# Altium PCB EB2018-LW27U19-P-MB03A(KL18).PcbDoc (part 2 of 2)
Units mm, origin at the board's own origin, x right, y up, seen from the top; angles counter-clockwise.
Board outline 338.42 x 232.18 mm, 2 copper layers (Top Layer, Bottom Layer); 163 components, 101 nets, 459 pads, 120 vias.
Unrouted connection lines stored in the file: 2.
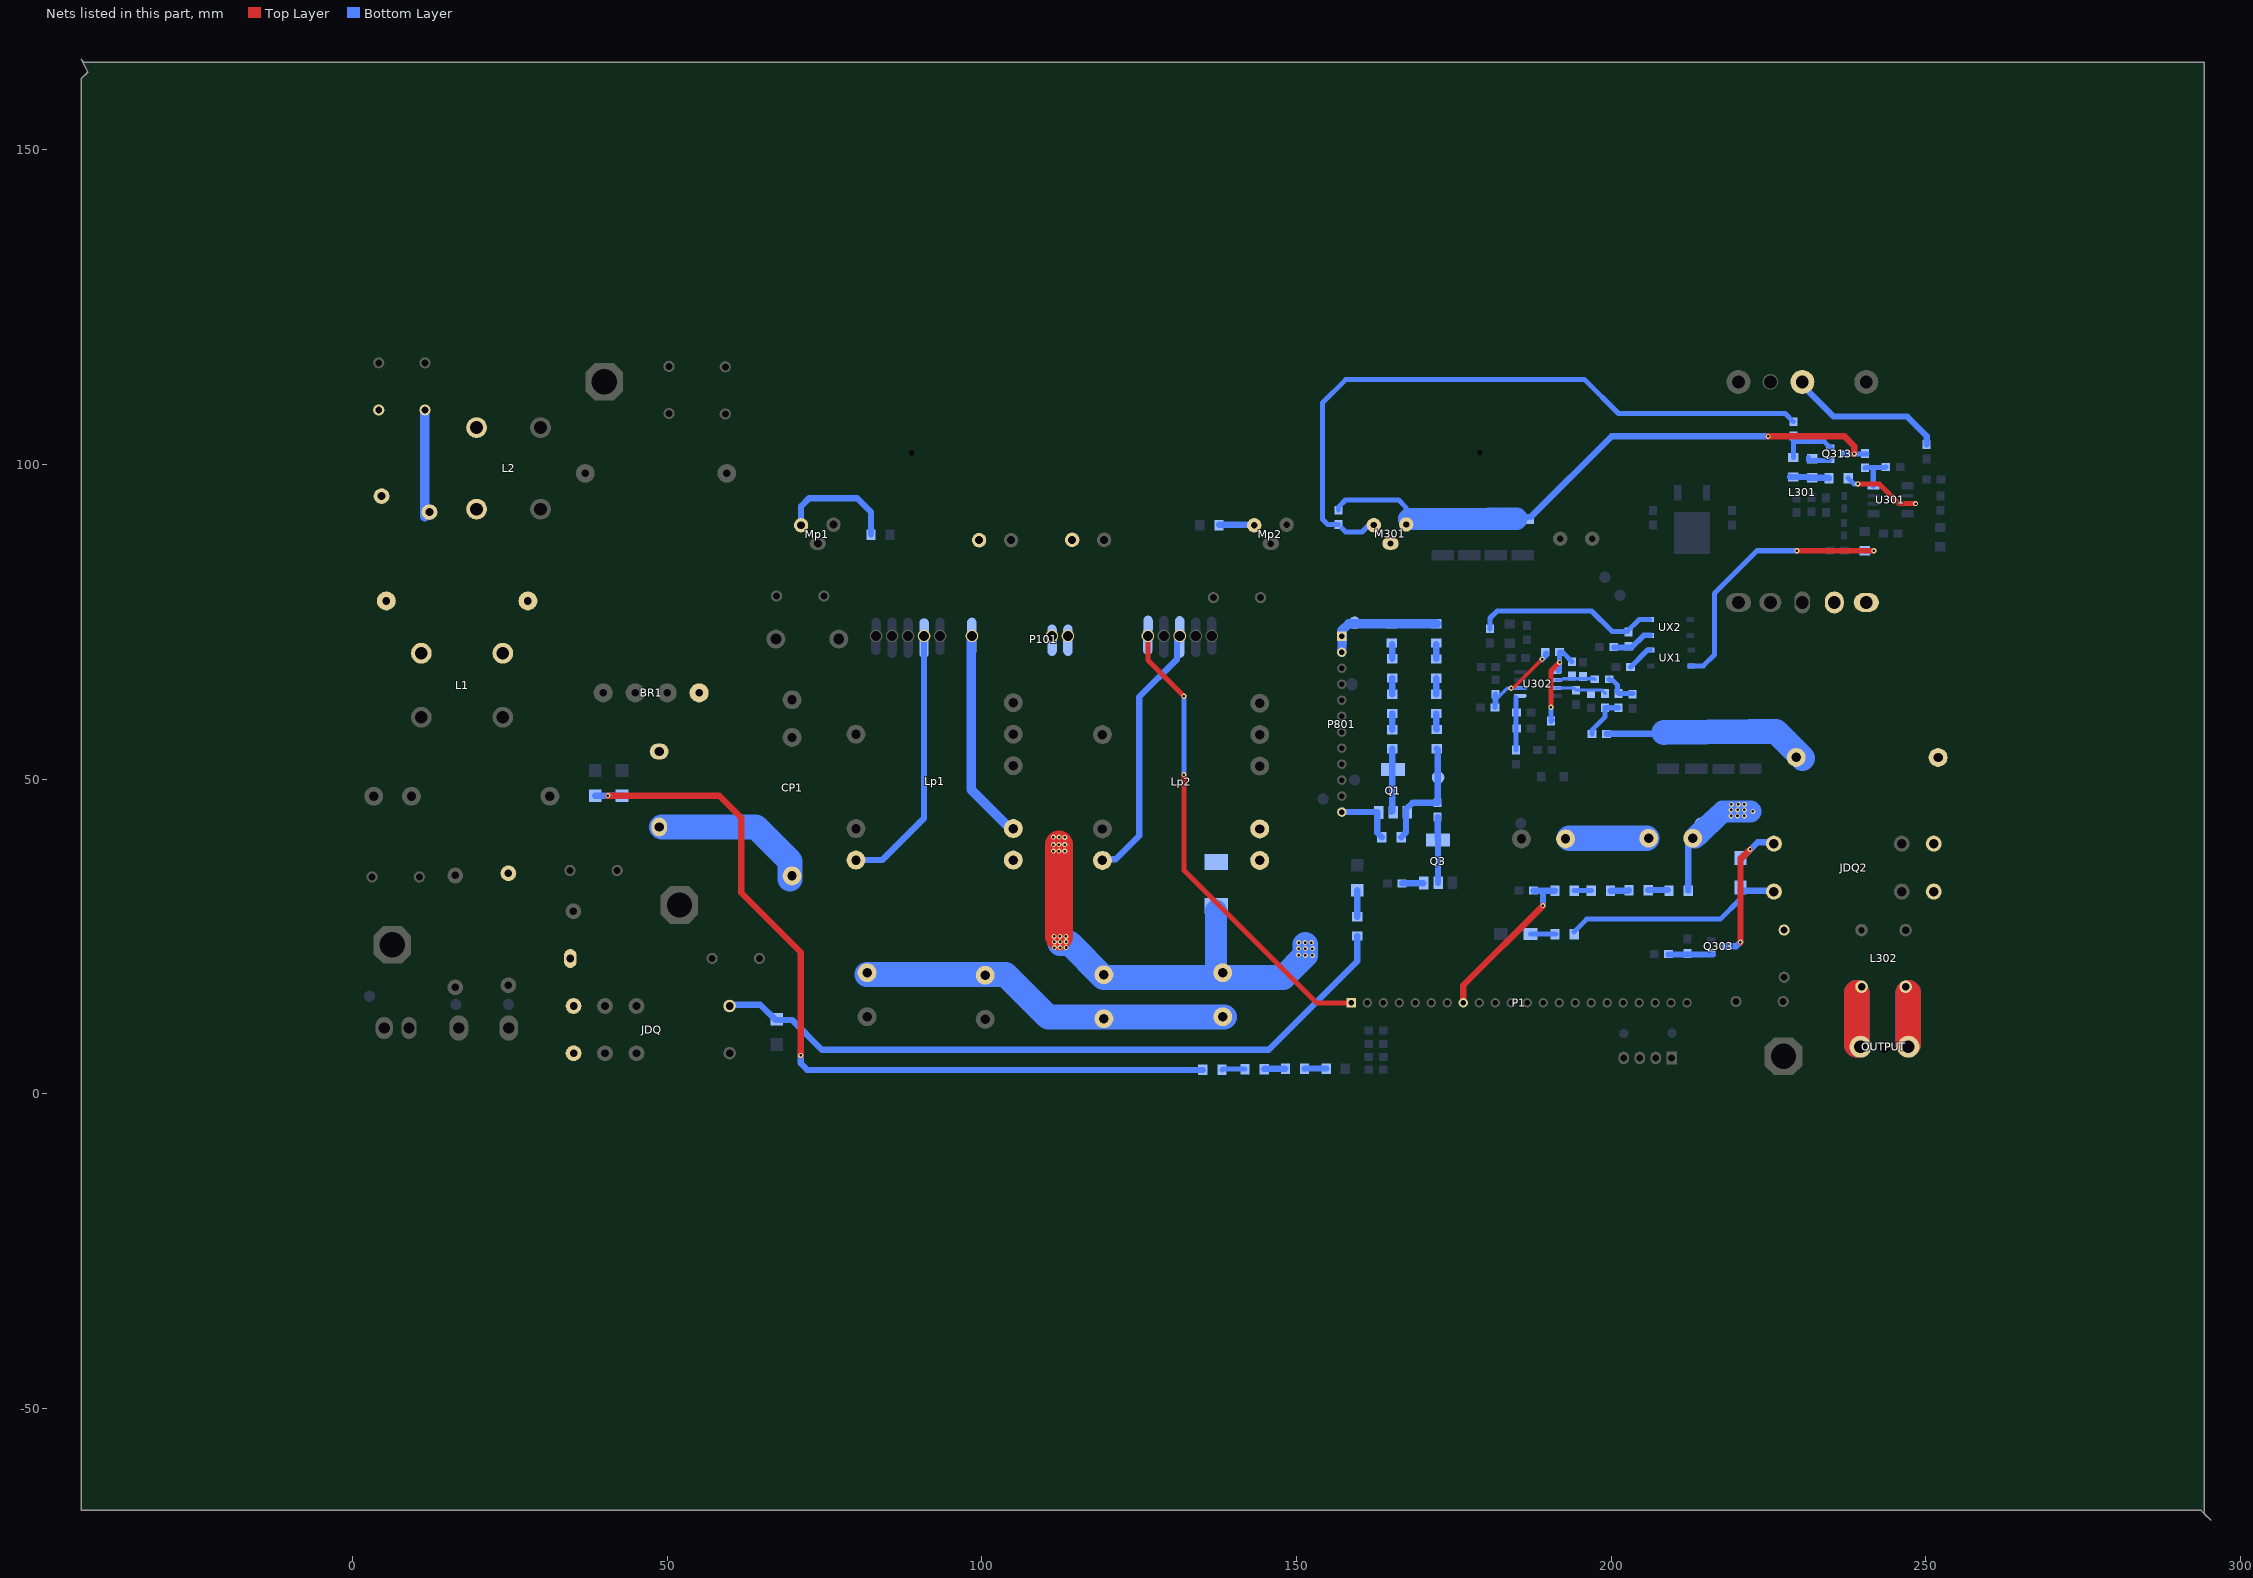
[diagram p2: the nets of this part, all layers, seen from the top]

## Via types
v1: diameter 0.8, hole 0.4, Top Layer to Bottom Layer, 120 vias

## Nets (pads, with @x,y where several pads share a name; then routed paths per layer and width w, separated by ;. In a path a pad name is that pad's centre, name@x,y a point inside that pad or via, vN(x,y) a via of type N, cw(c..) or ccw(c..) an arc to the next point about the centre after c; other vN are vias at no path point) (continued)
NetC315_1: C315.1 R314.1 U301.4 | length 6.3
  Bottom Layer w0.8: R314.1@240.351,99.472 240.41,99.531 241.776,99.531 ; U301.4@241.671,96.59 241.671,99.426 241.776,99.531 ; C315.1@243.658,99.59 243.599,99.531 241.776,99.531
NetC316_1: C316.1 R306.2 R307.1 U302.5 | length 8.4
  Bottom Layer w0.8: R307.1@184.881,54.644 184.881,60.576 U302.5@184.881,62.997
NetC317_1: C317.1 R305.1 R308.2 U302.6 | length 16.7
  Top Layer w0.6: v1(184.119,64.438) 184.418,64.438 v1(189.04,69.061)
  Bottom Layer w0.6: 181.842,62.133 181.842,62.762 183.519,64.438 v1(184.119,64.438) U302.6@186.405,64.438
  Bottom Layer w0.8: R308.2@181.558,61.39 181.558,63.416 C317.1@181.643,63.5 ; v1@188.994,68.939 R305.1@189.731,69.676 ; R305.1@189.712,70.057 R305.1@189.606,69.95 ; R305.1@189.606,69.95 189.606,69.857 R305.1@189.731,69.676 ; R305.1@189.606,69.95 R305.1@189.731,69.676
NetC318_1: C318.1 R331.2 R332.1 | length 7.1
  Bottom Layer w0.8: R331.2@196.994,57.187 196.994,57.822 199.078,59.905 R332.1@199.078,61.341 C318.1@201.2,61.341
NetC318_2: C318.2 R333.2 R334.1 | length 5.3
  Bottom Layer w0.8: R333.2@199.713,65.869 199.948,65.634 200.338,65.634 201.057,64.915 201.057,63.769 C318.2@201.2,63.627 ; C318.2@201.2,63.607 R334.1@203.451,63.607
NetC325_1: C325.1 C326.2 | length 12.3
  Bottom Layer w4: C325.1@193.356,40.607 C326.2@205.679,40.607
NetC326_1: C326.1 CP2.1 JDQ2.5 L301.10 L301.11 pad.12@214.193,42.977 R326.1 | length 19.3
  Bottom Layer w1: R326.1@212.258,32.287 C326.1@212.258,41.115
  Bottom Layer w3.5: C326.1@213.381,40.725 213.851,41.166 214.937,42.185 217.781,44.857 220.098,44.857 v1@222.195,44.857
  other v1: 219.077,44.163 220.098,44.163 221.207,44.163 222.554,44.857 219.096,45.118 220.111,45.118 221.207,45.118 219.117,45.973 220.225,45.973 221.207,45.973
NetCA1_1: BOX1.2 JDQ.1 RF1.2
NetCA2_1: CA2.1 CA4.1 L1.4 L2.3 VR3.1 | length 16.8
  Bottom Layer w1.5: VR3.1@11.531,91.698 CA4.1@11.531,108.492
NetCA2_2: CA2.2 CA5.2 L1.2 L2.1 VR3.2
NetCp12_1: Cp12.1 Cp13.2 Cp14.2 Cp15.1 | length 59.6
  Bottom Layer w4: Cp12.1@81.763,18.964 100.549,18.964 103.795,18.964 110.568,12.191 119.416,12.191 138.303,12.191 Cp14.2@138.535,12.191
NetD304_A: D304.A R321.1 R322.1 | length 6.2
  Bottom Layer w1: D304.A@228.44,98.04 R322.1@231.351,98.017 ; R322.1@231.351,97.878 234.565,97.878 R321.1@234.628,97.815
NetD304_K: D304.K Q313.E R323.1 | length 9.2
  Bottom Layer w0.8: D304.K@228.976,101.1 228.972,101.105 228.972,103.687 233.802,103.687 Q313.E@234.833,102.656 ; Q313.E@234.783,102.656 234.783,102.522 Q313.E@234.875,102.614
  Bottom Layer w1: Q313.E@234.783,102.656 Q313.E@234.833,102.656
NetD305_A: D305.A JDQ2.1 Q303.C | length 24.9
  Top Layer w1: v1(220.569,24.097) 220.569,37.307 v1(222.093,38.831)
  Bottom Layer w1: Q303.C@218.222,23.437 219.909,23.437 v1(220.569,24.097) ; D305.A@220.569,37.474 220.818,37.474 223.293,39.949 JDQ2.1@226.409,39.949
NetD305_K: D305.K JDQ2.2 R349.2 | length 35.2
  Bottom Layer w0.8: R349.2@194.142,25.746 196.14,27.743 217.364,27.743 220.569,30.949 D305.K@220.636,32.244
  Bottom Layer w1: D305.K@220.636,32.244 JDQ2.2@225.946,32.244
NetD306_K: D306.K R349.1 | length 4
  Bottom Layer w0.8: D306.K@187.202,25.424 R349.1@191.23,25.424
NetDA1_2: DA1.K RA1.2 | length 4.2
  Bottom Layer w1: DA1.K@159.663,32.327 159.663,28.12 RA1.2@159.67,28.113
NetDA2_2: DA2.K JDQ.4 RA1.1 | length 112.9
  Bottom Layer w1: JDQ.4@59.689,13.789 60.038,14.137 64.825,14.137 67.243,11.719 69.874,11.719 74.6,6.993 145.616,6.993 159.67,21.047 RA1.1@159.67,25.065
NetDA3_2: DA3.K DA4.K R713.1 | length 134.5
  Top Layer w1: v1(40.606,47.364) 58.286,47.364 61.767,43.883 61.767,31.952 71.245,22.474 v1(71.245,6.106)
  Bottom Layer w1: DA3.K@38.583,47.364 v1(40.606,47.364) DA4.K@42.831,47.364 ; v1@71.245,6.478 v1(71.245,6.106) 71.245,4.83 72.281,3.794 R713.1@135.128,3.794
NetDZ1_2: DZ1.K pad.0@172.514,50.264 Q1.B R803.1 R818.2 | length 18.9
  Bottom Layer w1: DZ1.K@166.664,40.764 167.411,41.512 167.411,45.199 168.469,46.257 R803.1@172.464,46.257 172.464,54.666 R818.2@172.289,54.841
NETIC2-7: DZ1.A P801.12 Q1.E | length 9.9
  Bottom Layer w1: P801.12@157.223,44.76 162.835,44.76 162.839,44.764 162.839,41.49 DZ1.A@163.565,40.764
NetL301_4: L301.4 R325.2 | length 25
  Bottom Layer w1: L301.4@230.402,113.123 230.402,112.582 235.377,107.607 247.059,107.607 250.158,104.508 R325.2@250.158,103.166
NetL302_2: L302.2 OUTPUT.3 pad.12@246.581,12.75 | length 16.4
  Top Layer w4: OUTPUT.3@247.23,7.842 247.23,16.066
  Bottom Layer w4: OUTPUT.3@247.23,7.842 247.23,16.066
NetL302_4: L302.4 OUTPUT.1 pad.13 | length 16.6
  Top Layer w4: OUTPUT.1@239.055,7.773 239.055,16.066
  Bottom Layer w4: OUTPUT.1@239.055,7.773 239.055,16.066
NetLF1_2: LF1.2 Mp2.G | length 5.6
  Bottom Layer w1: LF1.2@137.693,90.411 Mp2.G@143.298,90.411
NetLF2_2: LF2.2 Mp1.G | length 19.2
  Bottom Layer w1: Mp1.G@71.298,90.341 71.298,93.387 72.556,94.645 80.21,94.645 82.395,92.46 LF2.2@82.395,88.878
NetM301_1: M301.G R323.2 R324.2 | length 106.2
  Bottom Layer w0.8: R324.2@156.729,90.452 154.985,90.452 154.154,91.283 154.154,109.788 157.837,113.471 195.816,113.471 201.186,108.101 227.665,108.101 R323.2@228.972,106.794 ; R324.2@157.292,89.836 157.846,89.283 160.434,89.283 161.518,90.367 M301.G@162.304,90.367
NetM301_3: M301.S Q313.C R314.2 R324.1 R346.1 R347.1 R348.1 R352.1 | length 98
  Top Layer w1: v1(224.959,104.474) 237.104,104.474 238.667,102.911 v1(238.667,101.69)
  Bottom Layer w0.8: R324.1@156.729,92.738 156.729,93.262 157.805,94.338 166.257,94.338 167.454,93.141 M301.S@167.454,90.467 ; M301.S@167.771,90.467 M301.S@167.91,90.467 ; Q313.C@237.119,101.69 v1(238.667,101.69) R314.2@240.696,101.69
  Bottom Layer w1: R346.1@184.615,91.337 184.94,91.662 R346.1@186.894,91.662 ; R346.1@187.287,91.674 200.088,104.474 v1(224.959,104.474)
  Bottom Layer w3.5: M301.S@167.91,91.333 172.135,91.333 R352.1@173.244,91.333 174.354,91.333 176.338,91.333 R348.1@177.468,91.333 177.49,91.311 R347.1@182.055,91.311 ; R347.1@180.651,91.373 181.696,91.373 R346.1@184.983,91.373
NetQ1_C: Q1.C R822.2 | length 13.3
  Bottom Layer w1: Q1.C@165.125,44.79 165.239,44.904 R822.2@165.239,54.814 Q1.C@165.239,51.597
NetQ3_C: Q3.C R803.2 | length 10.2
  Bottom Layer w1: Q3.C@172.464,40.596 R803.2@172.464,43.971 ; Q3.C@172.514,33.539 Q3.C@172.514,40.346
NetQ3_E: Q3.E R804.2 | length 3.4
  Bottom Layer w1: R804.2@166.77,33.439 Q3.E@170.154,33.439
NetQ303_B: Q303.B R350.2 R351.2 | length 7
  Bottom Layer w1: R350.2@209.144,22.137 Q303.B@216.142,22.137
NetQ313_B: Q313.B R322.2 | length 4
  Bottom Layer w0.8: R322.2@231.351,101.065 231.351,100.66 231.396,100.615 234.783,100.615 Q313.B@234.833,100.725
NetR303_2: R303.2 R304.1 UX2.1 | length 6.6
  Bottom Layer w0.88: R303.2@200.423,70.915 203.274,70.915 205.196,72.836 UX2.1@206.218,72.836
NetR305_2: R305.2 R335.2 R336.1 U302.1 | length 16
  Top Layer w0.8: v1(190.456,61.419) 190.456,67.186 v1(191.827,68.556)
  Bottom Layer w0.8: R336.1@190.456,59.219 v1(190.456,61.419) ; R336.1@190.456,59.169 190.481,59.194 R336.1@190.694,59.406 ; U302.1@191.566,67.186 191.827,67.447 v1(191.827,68.556) R305.2@191.827,70.229 192.234,70.229 R335.2@193.803,68.66
NetR311_2: R311.2 UX1.2 | length 4.4
  Bottom Layer w0.8: R311.2@203.079,67.78 205.807,70.508 UX1.2@206.304,70.508
NetR320_1: R320.1 UX1.4 | length 44.1
  Top Layer w0.8: v1(229.55,86.289) v1(241.776,86.289)
  Bottom Layer w0.8: UX1.4@212.522,68.008 UX1.4@212.723,68.008 214.663,68.008 216.431,69.776 216.431,79.512 223.208,86.289 v1(229.55,86.289) ; R320.1@240.251,86.189 R320.1@240.351,86.289 v1(241.776,86.289)
NetR321_2: R321.2 U301.7 | length 14.4
  Top Layer w0.8: v1(239.207,96.9) 242.626,96.9 245.766,93.76 v1(248.384,93.771)
  Bottom Layer w0.6: U301.7@246.408,93.76 U301.7@247.132,93.76 v1(248.384,93.771)
  Bottom Layer w0.8: R321.2@237.676,97.815 238.576,96.915 238.929,96.901 v1(239.207,96.9)
NetR326_2: R326.2 R327.1 | length 3
  Bottom Layer w1: R327.1@205.905,32.367 R326.2@208.758,32.367 ; R326.2@208.803,32.367 R326.2@208.991,32.367
NetR327_2: R327.2 R328.1 | length 3
  Bottom Layer w1: R328.1@199.921,32.281 202.772,32.281 R327.2@202.857,32.367
NetR328_2: R328.2 R329.1 | length 2.7
  Bottom Layer w0.8: R329.1@194.142,32.281 R328.2@196.873,32.281
NetR332_2: C314.1 R332.2 R343.2 U302.3 | length 8.3
  Bottom Layer w0.5: U302.3@191.156,64.496 194.102,64.496 C314.1@194.463,64.135 198.57,64.135 R332.2@199.078,63.627
NetR333_1: C313.2 R333.1 R335.1 U302.2 | length 6.4
  Bottom Layer w0.5: U302.2@191.156,65.766 192.172,65.766 192.364,65.957 193.776,65.957 195.569,65.957 197.339,65.957 R333.1@197.427,65.869
NetR334_2: 
NetR710_1: R710.1 R711.2 | length 3.4
  Bottom Layer w1: R711.2@151.303,3.997 151.312,4.006 R710.1@154.736,4.006
NetR711_1: R711.1 R712.2 | length 3.4
  Bottom Layer w1: R712.2@144.897,3.928 144.965,3.997 R711.1@148.255,3.997
NetR712_1: R712.1 R713.2 | length 3.7
  Bottom Layer w0.8: R713.2@138.176,3.794 138.31,3.928 R712.1@141.849,3.928
NetR815_2: R815.2 R816.1 | length 2.3
  Bottom Layer w1: R816.1@172.214,69.089 R815.2@172.214,71.439
NetR816_2: R816.2 R817.1 | length 2.6
  Bottom Layer w1: R816.2@172.214,66.041 172.214,63.514 R817.1@172.239,63.489
NetR817_2: R817.2 R818.1 | length 2.6
  Bottom Layer w1: R817.2@172.239,60.441 172.239,57.939 R818.1@172.289,57.889
NetR819_2: R819.2 R820.1 | length 2.3
  Bottom Layer w1: R819.2@165.205,71.439 165.239,71.405 R820.1@165.239,69.112
NetR820_2: R820.2 R821.1 | length 2.6
  Bottom Layer w1: R821.1@165.239,63.487 R820.2@165.239,66.064
NetR821_2: R821.2 R822.1 | length 2.6
  Bottom Layer w1: R822.1@165.239,57.862 R821.2@165.239,60.439
OCS: CA9.1 CP2.2 JDQ2.6 R331.1 R340.2 R341.2 R342.2 R344.2 | length 38.1
  Bottom Layer w1: R331.1@199.28,57.187 213.345,57.187 R342.2@213.553,57.395
  Bottom Layer w4: R344.2@208.435,57.395 222.156,57.568 226.195,57.568 CP2.2@230.438,53.324
PFC_ON/OFF: P1.1 P101.5 pad.20 | length 75.1
  Top Layer w0.8: P101.5@126.393,72.754 126.393,68.93 132.108,63.215 v1(132.108,63.168) ; v1(132.115,50.73) 132.115,35.544 153.199,14.46 158.441,14.46 P1.1@158.741,14.16
  Bottom Layer w0.8: v1(132.108,63.168) 132.108,50.737 v1(132.115,50.73)
PFC_V: Cp13.1 Cp14.1 D1.1 D2.1 D3.K M301.D P101.10 P101.11 P801.1 P801.2 pad.9@159.262,74.832 R815.1 R819.1 | length 87.5
  Top Layer w4.5: v1@112.276,25.005 v1(112.276,38.568) v1(112.276,39.577)
  Bottom Layer w1.5: P801.2@157.223,70.16 157.33,72.647 157.323,72.711 157.223,73.601 158.311,74.689 R819.1@165.139,74.689 R815.1@172.214,74.689
  Bottom Layer w3.5: Cp14.1@137.265,19.513 D3.K@137.265,29.104
  Bottom Layer w4: v1@112.459,23.932 113.918,23.932 119.375,18.476 138.303,18.476 147.919,18.476 151.4,21.956 v1@151.4,23.734
  other v1: 151.447,22.003 152.556,22.003 150.35,22.041 150.35,23.053 151.447,23.053 152.556,23.053 111.554,23.226 112.46,23.226 113.42,23.244 150.368,24.017 151.4,24.017 152.381,24.017 111.553,24.141 112.459,24.141 113.419,24.159 111.519,25.005 112.424,25.005 113.385,25.022 111.397,38.568 113.193,38.552 111.397,39.577 113.193,39.577 113.193,40.73 111.397,40.785 112.303,40.785
UX2-C: R304.2 R316.1 UX2.2 | length 29.7
  Bottom Layer w0.8: R316.1@180.778,73.897 180.778,75.59 181.911,76.724 196.908,76.724 200.155,73.477 202.587,73.477 204.446,75.336 UX2.2@206.218,75.336
V_OUT: P1.8 R329.2 R330.2 | length 26.6
  Top Layer w1: P1.8@176.521,14.46 176.521,17.234 v1(189.188,29.901)
  Bottom Layer w1: R330.2@187.685,32.281 189.39,32.281 ; v1@189.188,29.901 189.188,32.079 189.39,32.281 ; R329.2@191.094,32.281 189.39,32.281
VDC: CP1.1 D3.A L3.2 Lp1.9 Lp1.10 Lp2.9 Lp2.10 P101.16 pad.25 | length 59.7
  Bottom Layer w1: Lp2.9@143.159,37.316 143.198,37.276 143.247,37.276 Lp2.9@143.578,37.607
  Bottom Layer w1.5: P101.16@98.311,72.719 98.311,48.35 104.518,42.142 Lp1.10@105.022,42.142
  Bottom Layer w4: L3.2@49.159,42.386 64.101,42.386 69.528,36.958 CP1.1@69.528,34.128
VDC1: BR1.4 L3.1
ZCDA: Lp1.5 P101.19 pad.19 | length 41.5
  Bottom Layer w1: Lp1.5@80.022,37.142 Lp1.5@80.022,37.142 84.176,37.141 90.833,43.797 P101.19@90.833,71.738
ZCDB: Lp2.5 P101.3 pad.24 | length 42.1
  Bottom Layer w1: Lp2.5@118.197,37.277 121.281,37.277 125.025,41.021 125.025,63.059 131.033,69.066 131.033,71.903 P101.3@131.257,72.127
pads on no net: ?.18 ?.19 JDQ.5 L301.5 L301.9 Lp1.1 Lp1.2 Lp2.1 Lp2.2 OUTPUT.2 P1.16 P1.17 P1.22 P801.3 P801.5 P801.8

## Polygon pours and split planes (outlines as drawn)
GND on Top Layer "Top Layer-GND" (solid, remove dead copper, pour order 66): 67.419,118.494 65.664,116.739 65.664,25.876 63.293,23.506 63.293,10.862 62.146,9.714 58.769,9.714 57.465,8.411 57.465,3.742 59.926,1.282 192.078,1.282 194.803,4.007 194.803,19.364 196.725,21.285 213.727,21.285 214.659,22.22 214.659,25.146 213.216,26.589 213.216,62.039 211.827,63.428 208.217,63.428 207.104,64.541 207.104,75.486 198.435,84.155 198.435,89.066 198.435,90.676 197.749,91.247 196.124,91.247 195.553,90.676 195.553,85.014 193.761,83.222 170.85,83.222 168.619,80.991 159.151,80.991 156.507,78.347 156.507,21.319 152.861,17.673 152.861,14.784 146.322,21.323 146.322,78.409 152.704,84.774 152.703,116.037 150.246,118.494
ISO-GND on Top Layer "Top Layer-ISO-GND" (solid, remove dead copper, pour order 54): 187.644,87.496 187.644,116.742 189.489,118.588 251.377,118.588 253.66,116.305 253.66,85.954 250.983,83.277 228.9,83.276 227.225,81.602 227.225,77.161 226.215,76.151 219.272,76.151 217.687,74.566 217.687,70.282 215.352,67.947 212.522,67.947 211.896,68.46 211.876,79.092 205.141,86.651 205.141,103.897 202.927,106.111 195.662,106.111 193.328,103.777 193.328,87.278 192.701,86.651 188.519,86.651
GND on Bottom Layer "Bottom Layer-GND" (solid, pour order 88): 183.055,31.379 183.055,47.876 186.156,50.977 188.669,50.977 188.901,50.745 188.901,49.061 189.72,48.242 194.663,48.242 196.182,49.76 200.101,53.679 222.962,53.679 223.819,52.823 223.819,50.553 223.837,50.535 222.988,49.685 222.988,49.65 203.054,49.65 198.308,44.904 189.793,44.904 188.228,43.338 188.228,37.555 186.156,35.483 186.156,31.463 185.72,31.027 183.407,31.027

## Keep-outs
Keep-Out Layer:
  circle w0.1: c47.473,81.739 r6
  lines w0.2: 0,0 0,120 255,120 255,0 0,0
  lines w1.5: 15.603,97.204 21.561,97.204
  text "LW27U19-P-MB02(JG23)" at 57.397,-31.272 h8

## Other copper
Top Layer:
  rectangle net GND: 195.437,83.724 198.607,90.676
  rectangle net GND: 170.835,20.193 172.686,29.344
  rectangle net GND: 174.995,20.342 176.759,29.098
  rectangle net GND: 204.05,49.768 210.722,54.121
  rectangle net GND: 176.844,45.528 178.901,49.177
  rectangle net GND: 176.237,44.732 177.765,48.533
  rectangle net GND: 175.253,44.278 177.361,47.662
  rectangle net GND: 174.975,51.829 176.376,55.794
  rectangle net GND: 175.745,53.912 178.535,55.516
  rectangle net GND: 176.174,52.17 176.881,54.493
  rectangle net GND: 176.604,52.422 177.033,54.266
  rectangle net GND: 176.25,53.218 177.866,53.9
  rectangle net GND: 176.818,52.536 177.21,53.458
  rectangle net GND: 177.007,53.028 177.626,53.609
  rectangle net GND: 198.184,87.353 198.461,89.11
  rectangle net GND: 197.833,87.982 198.387,88.481
  rectangle net GND: 195.553,87.372 195.743,88.896
  rectangle net GND: 195.614,87.926 196.243,88.37
  pour cut-out: 129.303,15.691 ccw(c138.303,15.691) 138.303,6.691 ccw(c138.303,15.691) 147.303,15.691 ccw(c138.303,15.691) 138.303,24.691 ccw(c138.303,15.691)
  pour cut-out: 110.481,15.42 ccw(c119.416,15.42) 119.416,6.484 ccw(c119.416,15.42) 128.351,15.42 ccw(c119.416,15.42) 119.416,24.355 ccw(c119.416,15.42)
  pour cut-out: 122.505,101.836 ccw(c130.505,101.836) 130.505,93.836 ccw(c130.505,101.836) 138.505,101.836 ccw(c130.505,101.836) 130.505,109.836 ccw(c130.505,101.836)
  pour cut-out: 80.874,101.811 ccw(c88.874,101.811) 88.874,93.811 ccw(c88.874,101.811) 96.874,101.811 ccw(c88.874,101.811) 88.874,109.811 ccw(c88.874,101.811)
  region net LED+: 247.496,38.748 247.496,40.915 246.764,41.647 243.284,41.647 237.923,36.286 237.923,25.759 238.797,24.885 240.219,24.885 241.055,25.721 241.055,34.987 244.396,38.328 247.076,38.328
  pour cut-out: 213.216,50.977 213.216,50.253 212.723,49.76 200.683,49.76 199.993,50.45 199.993,35.299 195.883,31.189 213.04,31.189 213.287,30.862 213.553,31.401 213.553,38.164 213.287,38.431 211.238,38.431 210.428,39.241 210.428,41.702 210.911,42.185 211.348,42.185 213.727,44.564 213.727,50.838 213.553,51.012
  pour cut-out: 109.885,21.491 109.885,9.605 113.385,6.106 144.729,6.106 148.263,9.64 152.037,13.414 153.708,13.414 153.745,13.451 153.403,13.451 140.265,26.589 138.983,25.307 118.376,25.307 116.606,27.077 115.72,27.077 115.204,26.561 115.204,24.073 112.873,21.742 110.385,21.742
  pour cut-out: 183.118,19.853 190.3,19.853 190.867,19.285 190.867,27.732 190.798,27.801 182.963,19.966 182.963,19.853
  pour cut-out: 174.986,14.812 174.775,15.024 174.775,19.841 175.188,19.428 177.245,19.428 177.388,19.285 177.287,19.285 175.791,17.789 175.791,15.055 175.549,14.812
  pour cut-out: 140.785,27.453 145.6,27.453 146.526,28.378 147.063,28.378 147.063,21.212
  pour cut-out: 63.63,24.19 68.068,24.19 65.613,26.646 64.603,26.646
  pour cut-out: 155.953,61.39 158.699,61.39 159.013,61.076 159.013,55.889 158.707,55.583 155.526,55.583 155.01,56.099 155.01,60.869 155.532,61.39
  region net NetCA2_2: 4.807,109.824 1.648,109.824 0.94,109.116 0.94,70.1 2.952,68.088 11.267,68.088 13.064,69.886 13.064,77.667 6.137,84.594 6.137,95.936 9.239,99.038 18.49,99.038 21.495,102.042 21.495,107.636 20.613,108.518 17.565,108.518 16.694,107.646 16.694,104.868 15.098,103.272 3.797,103.272 2.44,101.916 2.44,81.867 4.525,79.782 4.484,79.411 4.115,79.411 2.021,81.504 2.021,105.401 4.186,107.565 4.803,107.565 5.121,107.884 5.121,109.511
  region net EARTH2: 1.797,115.664 1.797,117.962 2.246,118.411 60.513,118.411 61.109,117.815 61.109,114.842 60.782,114.514 44.432,114.514 43.563,113.646 43.563,111.462 42.173,110.072 37.979,110.072 36.589,111.462 36.589,113.73 35.053,115.266 2.194,115.267
  region net L: 23.486,5.13 23.486,17.993 24.075,18.582 26.93,18.582 27.826,17.686 27.826,5.048 27.256,4.478 24.283,4.478
  region net N: 14.881,4.99 14.881,18.021 15.358,18.498 17.771,18.498 18.436,17.833 18.436,4.685 18.055,4.304 15.721,4.304
  region net EARTH: 3.667,35.28 1.516,35.28 1.17,34.934 1.17,4.793 2.278,3.685 8.888,3.685 10.212,5.009 10.212,13.314 9.719,13.807 9.72,25.029 7.769,26.979 5.257,26.979 4.213,28.024 4.213,34.696
  region net OCS: 231.228,55.404 235.096,51.535 235.096,25.199 237.208,23.087 249.223,23.087 250.042,23.906 250.042,33.212 250.728,33.899 253.157,33.899 253.884,33.172 253.884,22.339 251.908,20.363 236.324,20.363 231.625,25.063 226.703,25.063 226.246,25.52 226.246,26.79 226.571,27.115 230.545,27.115 231.685,28.255 231.685,49.188 228.038,52.835 228.039,54.14 229.334,55.436
  region net PFC_V: 165.844,88.416 164.099,88.416 163.385,87.701 163.385,84.527 161.179,82.322 156.648,82.321 149.452,75.125 149.452,21.797 149.995,21.255 152.981,21.255 153.323,21.597 153.323,68.555 154.247,69.479 157.701,69.479 158.096,69.786 158.096,75.742 159.93,77.561 165.225,77.561 166.558,78.57 166.558,87.701
  region net NetC326_1: 245.824,79.896 234.791,79.896 234.002,79.106 234.002,73.196 232.401,71.596 226.074,71.596 216.759,62.281 216.759,45.681 218.992,43.447 222.868,43.447 224.507,45.086 224.507,57.113 228.812,61.419 247.272,61.419 249.556,59.134 249.557,38.992 250.181,38.367 253.088,38.367 253.828,39.107 253.828,64.638 252.24,66.225 228.038,66.225 220.818,59.004 220.818,48.354 220.446,47.982 220.098,48.33 220.098,59.293 227.823,67.018 244.873,67.018 247.533,69.678 247.533,79.233 246.871,79.896
Bottom Layer:
  region net PFC_V: 134.314,20.02 135.667,21.374 138.881,21.374 140.234,20.02
  region net NetCA2_1: 11.425,96.914 11.425,94.336 13.865,94.336
  region net NetCA2_1: 11.823,95.207 19.92,95.207 21.054,94.073 21.054,89.935 32.068,78.921 32.068,69.239 31.12,68.291 22.975,68.291 21.838,69.429 21.838,76.43 23.341,77.933 25.833,77.933 26.005,78.105 25.822,78.287 23.292,78.287 10.952,90.627 10.952,94.336
  region net GND: 174.99,55.417 174.99,44.736 175.647,44.079 175.647,35.159 175.45,34.961 174.417,34.961 173.981,34.526 173.981,32.719 174.334,32.367 177.995,32.367 178.407,32.779 178.407,55.136 177.654,55.889 175.462,55.889
  region net GND: 167.986,13.668 167.986,26.698 169.401,28.113 177.076,28.113 177.7,27.489 177.7,20.679 176.874,19.853 173.099,19.853 172.249,19.003 172.249,13.566 171.718,13.16 168.611,13.16
  region net AC2: 27.864,105.117 27.864,106.958 29.424,108.518 31.86,108.518 37.23,103.148 47.597,103.148 49.324,104.876 49.324,108.847 49.647,109.169 51.111,109.169 51.409,108.872 51.409,103.089 49.423,101.104 49.423,101.154 42.216,101.154 37.976,96.914 36.067,96.914
  region net VDC1: 53.473,64.737 53.473,57.919 51.501,55.947 47.944,55.947 47.233,55.236 47.233,53.074 47.637,52.669 56.174,52.669 57.116,53.61 57.081,53.61 57.081,64.623 56.341,65.363 54.099,65.363
  region net EARTH1: 41.375,36.581 50.775,36.581 58.14,29.216 58.14,21.011 57.465,20.335 55.691,20.335 40.882,35.144 40.882,36.088
  region net NetBOX1_2: 21.479,61.018 21.479,51.892 27.982,45.389 27.982,33.959 34.644,27.297 38.829,23.112 38.829,4.35 39.491,3.687 42.211,3.687 42.831,4.307 42.831,26.29 35.948,33.173 35.948,38.947 32.877,42.018 32.877,47.998 26.875,54 26.875,60.609 25.748,61.736 22.197,61.736
  region net NetCA1_1: 32.647,4.42 32.647,20.062 23.317,29.392 23.317,35.891 24.007,36.581 25.823,36.581 26.422,35.982 26.422,32.274 36.738,21.958 36.738,4.369 36.195,3.826 33.192,3.826
  region net NetBOX2_1: 0.98,45.769 0.98,60.115 2.773,61.908 11.356,61.908 12.584,60.68 12.584,45.063 17.771,39.876 17.771,33.903 17.214,33.346 13.652,33.346 12.87,34.128 12.87,38.804 5.739,45.935 4.928,45.935 4.985,45.55 11.93,38.368 11.92,33.532 11.486,33.098 9.996,33.098 9.388,33.706 9.388,37.361 2.052,44.697
  region net L: 23.486,4.998 23.486,17.993 24.075,18.582 26.886,18.582 27.826,17.642 27.826,4.862 27.353,4.388 24.232,4.388
  region net N: 14.881,4.99 14.881,18.021 15.358,18.498 17.771,18.498 18.436,17.833 18.436,4.685 18.055,4.304 15.721,4.304
  region net EARTH: 3.667,35.28 1.516,35.28 1.175,34.939 1.175,4.696 2.186,3.685 8.91,3.685 10.191,4.966 10.191,13.336 9.719,13.807 9.719,25.072 7.812,26.979 5.257,26.979 4.219,28.017 4.219,34.689
  region net OCS: 231.599,54.948 235.096,51.451 235.096,25.199 237.208,23.087 249.223,23.087 249.987,23.851 249.987,31.321 249.987,33.158 250.728,33.899 253.157,33.899 253.884,33.172 253.884,22.339 251.908,20.363 236.324,20.363 231.624,25.062 226.703,25.063 226.246,25.52 226.246,26.79 226.571,27.115 230.52,27.115 231.625,28.22 231.625,49.259 228.935,51.948 228.935,53.34 230.561,54.966
  region net CS: 37.91,71.563 39.764,73.416 59.104,73.417 64.707,67.814 71.242,67.814 73.608,70.181 73.608,72.908 74.904,74.204 77.85,74.204 78.85,73.204 78.85,67.612 73.38,62.142 73.38,55.71 72.297,54.627 66.298,54.627 65.182,55.743 65.182,62.392 57.881,69.694 43.487,69.694 41.607,67.814 41.607,62.787 40.84,62.02 38.573,62.02 37.91,62.683
  region net PFC_V: 97.151,87.617 97.151,97.003 99.431,99.283 113.263,99.283 115.774,96.772 115.774,77.661 114.649,76.536 114.649,38.931 113.819,38.102 110.888,38.102 110.177,38.813 110.177,93.075 108.782,94.47 102.225,94.47 100.85,93.095 100.85,87.575 100.109,86.833 97.952,86.833
  region net NetC29_1: 118.275,88.757 118.826,89.308 122.07,89.308 122.484,88.895 122.484,86.619 123.325,85.778 143.526,85.778 144.127,86.379 144.127,87.374 145.173,88.419 146.664,88.42 147.789,87.295 147.789,84.173 145.948,82.333 145.948,51.177 145.396,50.624 141.625,50.624 140.936,51.313 140.936,80.302 139.419,81.819 120.169,81.819 118.299,83.689
  region net VDC: 66.671,37.721 70.978,37.721 71.624,37.075 71.624,33.832 72.556,32.9 101.695,32.9 102.845,34.05 102.845,43.327 103.821,44.303 106.263,44.303 107.1,43.466 107.1,34.085 108.285,32.9 124.619,32.9 135.5,43.781 145.307,43.781 146.368,42.719 146.369,36.718 145.328,35.677 133.97,35.677 127.043,28.75 70.76,28.75 66.131,33.379 66.131,37.18
  region net NetC28_1: 74.98,88.372 72.859,88.372 71.778,87.186 71.778,78.444 72.398,77.825 74.952,77.825 75.827,78.45 75.827,80.42 76.251,80.844 100.774,80.844 102.505,79.38 102.505,51.879 103.85,50.534 106.275,50.535 106.932,51.191 106.932,65.459 106.932,88.633 106.321,89.244 104.107,89.244 103.409,88.546 103.409,86.157 102.002,84.75 76.822,84.75 76.068,85.504 76.068,87.284

## Silkscreen, mask and mechanical layers (free items; w line width, h text height)
Top Overlay:
  lines w0.2: 200.139,6.982 201.974,6.982 201.974,7.612 ; 209.697,7.639 209.697,6.982 211.531,6.982
  text "CS" at 36.57,90.512 h0.75
  text "VDC" at 58.352,90.293 h0.75
  text "GDA" at 83.38,76.098 h0.75 r90
  text "GND" at 86.15,76.098 h0.75 r90
  text "+15V" at 88.512,76.098 h0.75 r90
  text "ZCDA" at 91.327,76.098 h0.75 r90
  text "CS" at 93.988,76.098 h0.75 r90
  text "VDC" at 98.963,76.098 h0.75 r90
  text "PFC-V" at 111.56,76.098 h0.75 r90
  text "PFC-V" at 114.115,76.098 h0.75 r90
  text "PFC-ON" at 126.707,76.098 h0.75 r90
  text "GND" at 129.191,76.098 h0.75 r90
  text "ZCDB" at 131.787,76.098 h0.75 r90
  text "GDB" at 134.301,76.098 h0.75 r90
  text "GND" at 139.969,71.816 h0.75 r90
  text "PFC+" at 152.102,69.709 h0.75
  text "GND" at 152.715,64.601 h0.75
  text "ISO-GND" at 149.888,59.596 h0.75
  text "ISO17.5V" at 149.177,57.133 h0.75
  text "GND" at 152.801,49.498 h0.75
  text "+15V" at 152.283,46.866 h0.75
  text "NET" at 152.801,44.275 h0.75
  text "15V" at 166.714,10.063 h0.75 r90
  text "GND" at 164.093,9.894 h0.75 r90
  text "GND" at 169.147,9.893 h0.75 r90
  text "GND" at 171.783,9.893 h0.75 r90
  text "GND" at 184.586,9.894 h0.75 r90
  text "GND" at 187.202,9.894 h0.75 r90
  text "GND" at 189.687,9.894 h0.75 r90
  text "ADIN" at 192.114,9.182 h0.75 r90
  text "V_OUT" at 177.076,8.56 h0.75 r90
  text "I_OUT" at 182.172,8.56 h0.75 r90
  text "GLV+" at 202.379,8.513 h0.75 r90
  text "JDQ_C" at 179.414,8.381 h0.75 r90
  text "485-A" at 204.913,8.391 h0.75 r90
  text "485-B" at 207.349,8.391 h0.75 r90
  text "GLGND" at 209.95,8.361 h0.75 r90
  text "INPUT_V" at 161.634,7.01 h0.75 r90
  text "L6562_C" at 174.334,7.01 h0.75 r90
  text "RB-" at 250.659,6.65 h1.5
  text "RB+" at 231.94,6.585 h1.5
  text "PFC_ON/OFF" at 159.142,4.75 h0.75 r90
  text "L" at 23.941,3.239 h2
  text "LW27U19-P-MB02(JG23)" at 161.461,3.01 h2.2
  text "N" at 15.566,2.964 h2
  text "+" at 202.714,1.098 h1.2 r90
  text "-" at 209.4,0.93 h1.2
  text "A" at 204.286,0.884 h1.2
  text "B" at 206.896,0.823 h1.2
Bottom Overlay:
  circle w0.254: c214.154,43.019 r1.2
  circle w0.254: c185.69,43.012 r1.2
  circle w0.254: c158.802,65.041 r1.2
  circle w0.254: c209.69,9.637 r1.2
  circle w0.254: c202.041,9.585 r1.2
  circle w0.254: c246.581,12.75 r1.2
  circle w0.254: c239.657,12.884 r1.2
  circle w0.254: c159.262,74.832 r1.2
  circle w0.254: c172.514,50.264 r1.2
  circle w0.254: c199.02,82.087 r1.2
  circle w0.254: c201.405,79.21 r1.2
  circle w0.254: c154.236,46.849 r1.2
  circle w0.254: c159.299,49.881 r1.2
  circle w0.254: c2.713,15.483 r1.2
  circle w0.254: c16.388,14.204 r1.2
  circle w0.254: c24.815,14.243 r1.2
  text "ISO-17.5" at 197.325,81.483 h0.75
  text "ISO-GND" at 199.719,78.65 h0.75
  text "PFC+" at 160.151,76.642 h0.75
  text "PFC-" at 161.044,66.694 h0.75
  text "ISO17.5V" at 154.589,57.095 h0.75
  text "GND" at 155.532,51.546 h0.75
  text "NET" at 176.391,49.851 h0.75
  text "+15V" at 161.04,47.407 h0.7
  text "15V" at 152.496,46.472 h0.7
  text "BUCK+" at 215.197,44.971 h0.75
  text "BUCK-" at 187.301,44.755 h0.75
  text "N" at 14.354,14.42 h0.75 r180
  text "L" at 27.462,13.838 h0.75
  text "LED-" at 251.82,12.352 h0.75
  text "LED+" at 237.409,12.236 h0.75
  text "GLV+" at 200.276,9.314 h1
  text "GLENG" at 216.292,9.055 h1
Bottom Solder:
  lines w1.5: 229.919,53.44 233.709,49.65 233.709,25.235 237.064,21.88 250.515,21.88 252.199,23.564
  lines w2: 3.398,47.326 9.534,47.326 ; 10.049,59.497 9.135,58.583 9.135,45.054 15.748,38.441 15.748,34.47 ; 16.341,10.452 16.341,17.033 ; 19.089,92.897 19.089,87.835 ; 23.961,59.211 23.961,53.718 31.478,46.201 31.478,33.548 40.606,24.42 40.606,6.542 40.141,6.077 ; 24.135,70.306 24.135,73.771 28.361,77.997 28.361,78.564 19.089,87.835 ; 24.795,34.583 24.795,31.186 35.141,20.84 35.141,6.447 ; 25.429,9.588 25.443,16.538 ; 29.292,106.541 29.292,106.485 36.955,98.822 ; 29.673,93.427 29.673,92.897 34.735,87.836 37.83,87.836 ; 38.319,88.162 cw(c47.473,81.739) 55.084,89.932 ; 39.619,63.911 39.619,69.429 41.802,71.612 58.552,71.612 66.458,63.705 71.047,63.705 76.138,68.797 76.138,71.081 77.025,71.967 ; 48.743,42.391 63.868,42.391 69.898,36.361 69.898,32.099 70.921,31.076 125.893,31.076 134.091,39.273 144.188,39.273 ; 48.801,54.333 53.786,54.333 55.093,55.639 55.093,63.705 ; 55.362,89.892 56.078,89.892 59.253,93.067 59.253,98.411 ; 69.855,56.933 69.855,62.615 ; 73.92,86.995 73.92,83.653 74.758,82.815 103.691,82.815 ; 81.983,12.138 100.243,12.138 ; 81.983,18.781 103.795,18.781 110.385,12.191 138.028,12.191 ; 99.093,88.372 99.093,95.612 100.484,97.003 110.437,97.003 112.37,95.069 112.37,39.427 ; 104.698,87.969 104.698,87.343 105.022,87.019 105.022,53.011 105.503,52.53 ; 112.558,24.449 113.401,24.449 119.208,18.642 148.345,18.642 151.4,21.696 ; 119.449,88.02 120.169,87.3 120.169,85.738 122.218,83.689 144.561,83.689 ; 137.473,19.555 137.473,29.155 ; 144.188,52.076 144.188,83.316 146.202,85.329 146.202,87.162 ; 169.382,91.333 171.122,91.333 ; 187.288,85.517 189.243,85.517 191.778,88.052 191.827,88.052 ; 192.77,40.495 204.71,40.495 ; 212.258,40.495 213.287,40.495 217.478,44.686 219.624,44.686 ; 225.579,57.37 226.393,57.37 229.919,53.844 ; 239.203,8.122 239.203,16.495 ; 239.676,26.46 239.676,36.066 243.664,40.054 245.984,40.054 ; 246.581,26.715 246.581,32.091 ; 247.23,7.886 247.23,16.495 ; 252.199,23.564 252.199,31.465 ; 19.089,87.835 19.089,87.835 ; 36.955,98.822 36.955,98.822 ; 146.202,87.162 146.202,87.162

## Dimensions
0,0 to 255,0 on Keep-Out Layer
0,120 to 0,0 on Keep-Out Layer

## Text inside footprints (layer, text, board x,y; h text height)
BR1: Bottom Overlay "～" at 49.505,69.293 h0.76; Bottom Overlay "～" at 44.425,69.293 h0.76; Bottom Overlay "-" at 39.421,69.039 h0.76; Bottom Overlay "+" at 54.661,69.141 h0.76
C325: Top Overlay "+" at 197.596,41.231 h1.2 r180
C326: Top Overlay "+" at 217.8,41.344 h1.2 r180
Cp12: Top Overlay "+" at 81.05,24.076 h1.2 r270
Cp13: Top Overlay "+" at 118.679,23.746 h1.2 r270
Cp14: Top Overlay "+" at 137.566,24.073 h1.2 r270
Cp15: Top Overlay "+" at 99.812,23.657 h1.2 r270
L1: Top Overlay "*" at 20.934,66.872 h0.76; Top Overlay "*" at 13.365,66.949 h0.76
L2: Top Overlay "*" at 26.848,103.438 h0.76 r270; Top Overlay "*" at 26.772,95.869 h0.76 r270